# Altium PCB BOTTOM_BOARD.PcbDoc
Units mm, origin at the board's own origin, x right, y up, seen from the top; angles counter-clockwise.
Board outline 102 x 86 mm, 2 copper layers (Top Layer, Bottom Layer), stack 1.071 mm thick; 20 components, 8 nets, 65 pads, 303 vias.
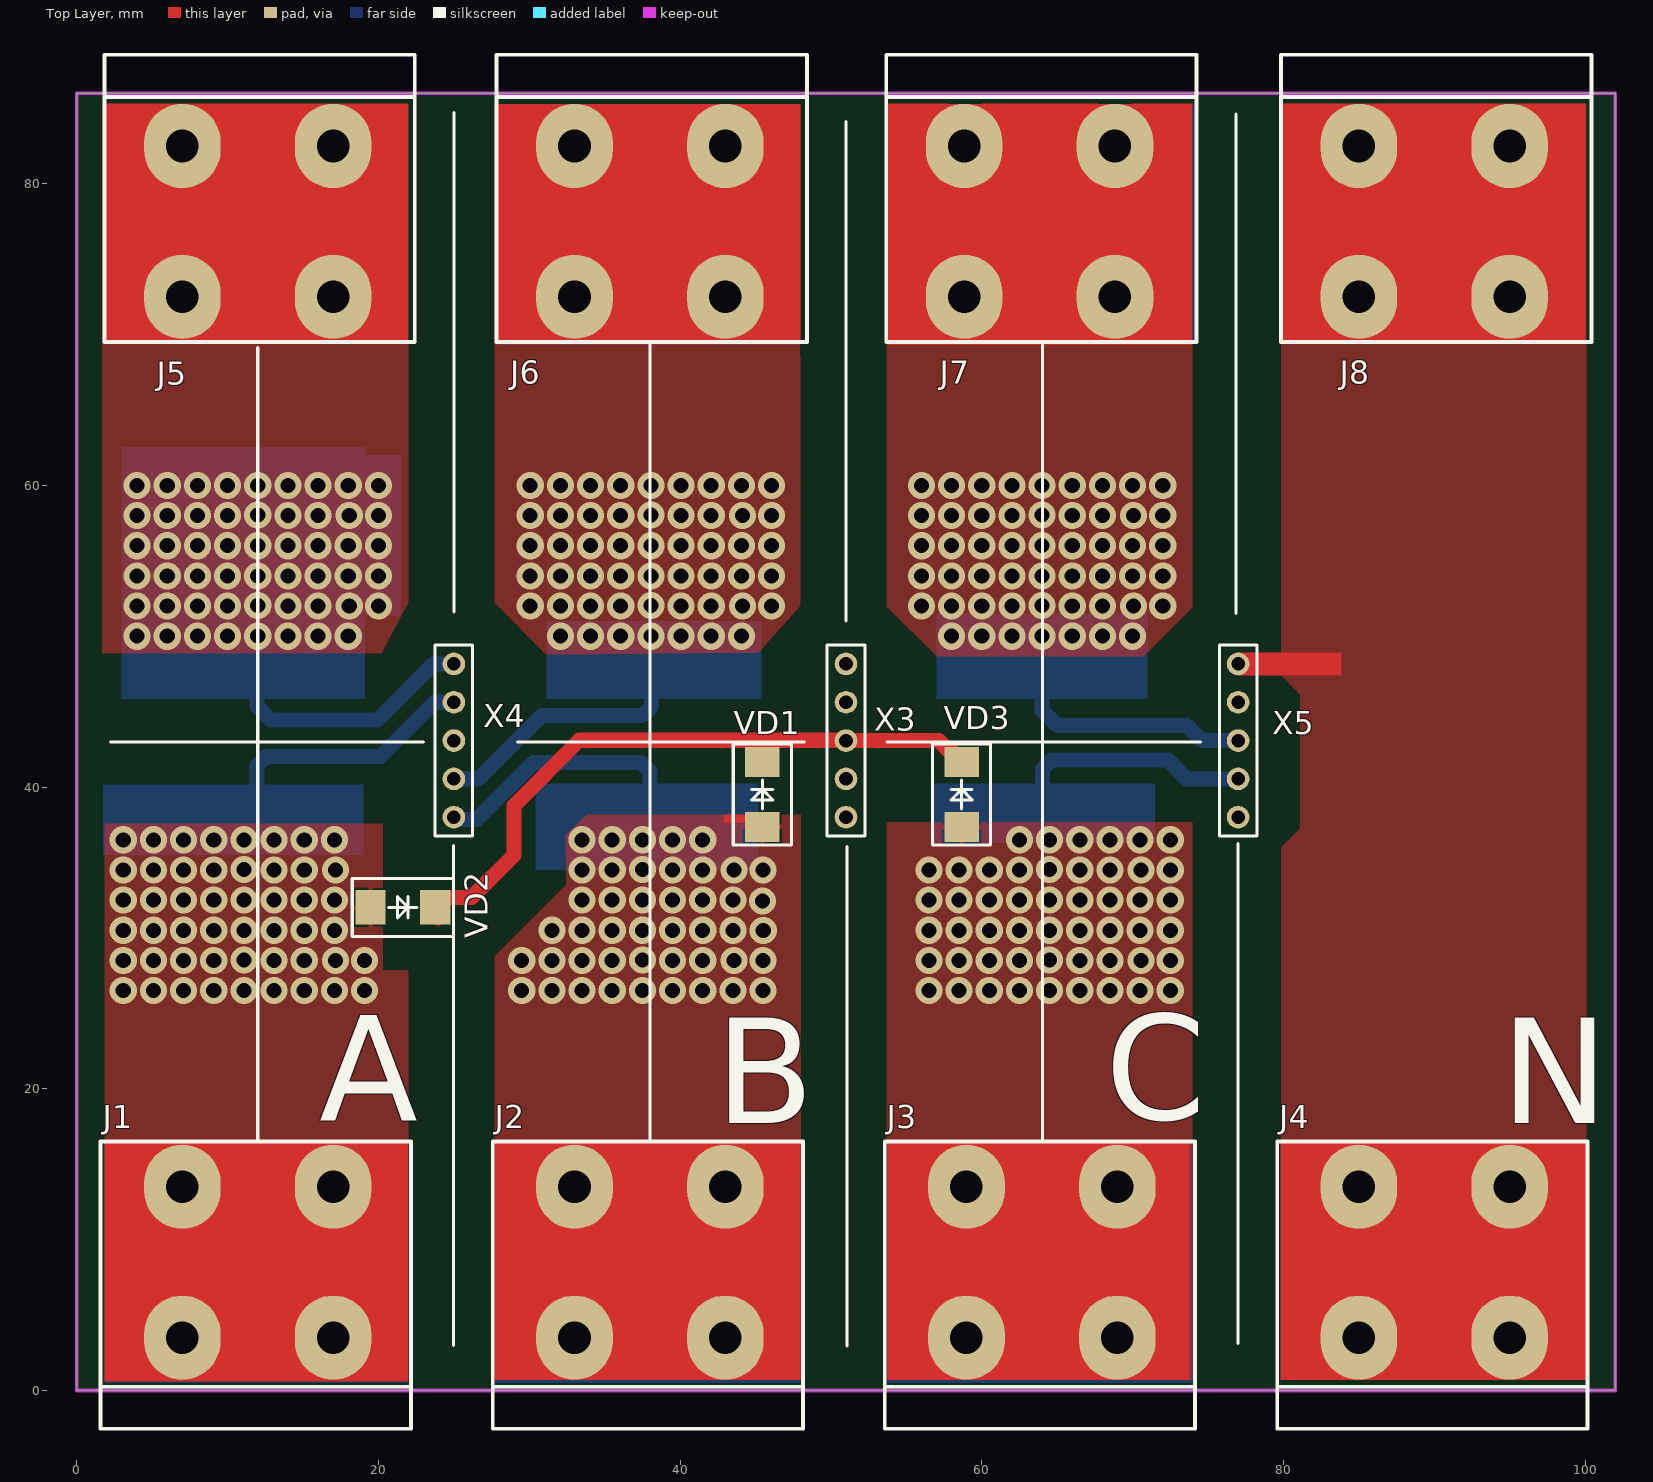
[diagram p0: Top Layer view]
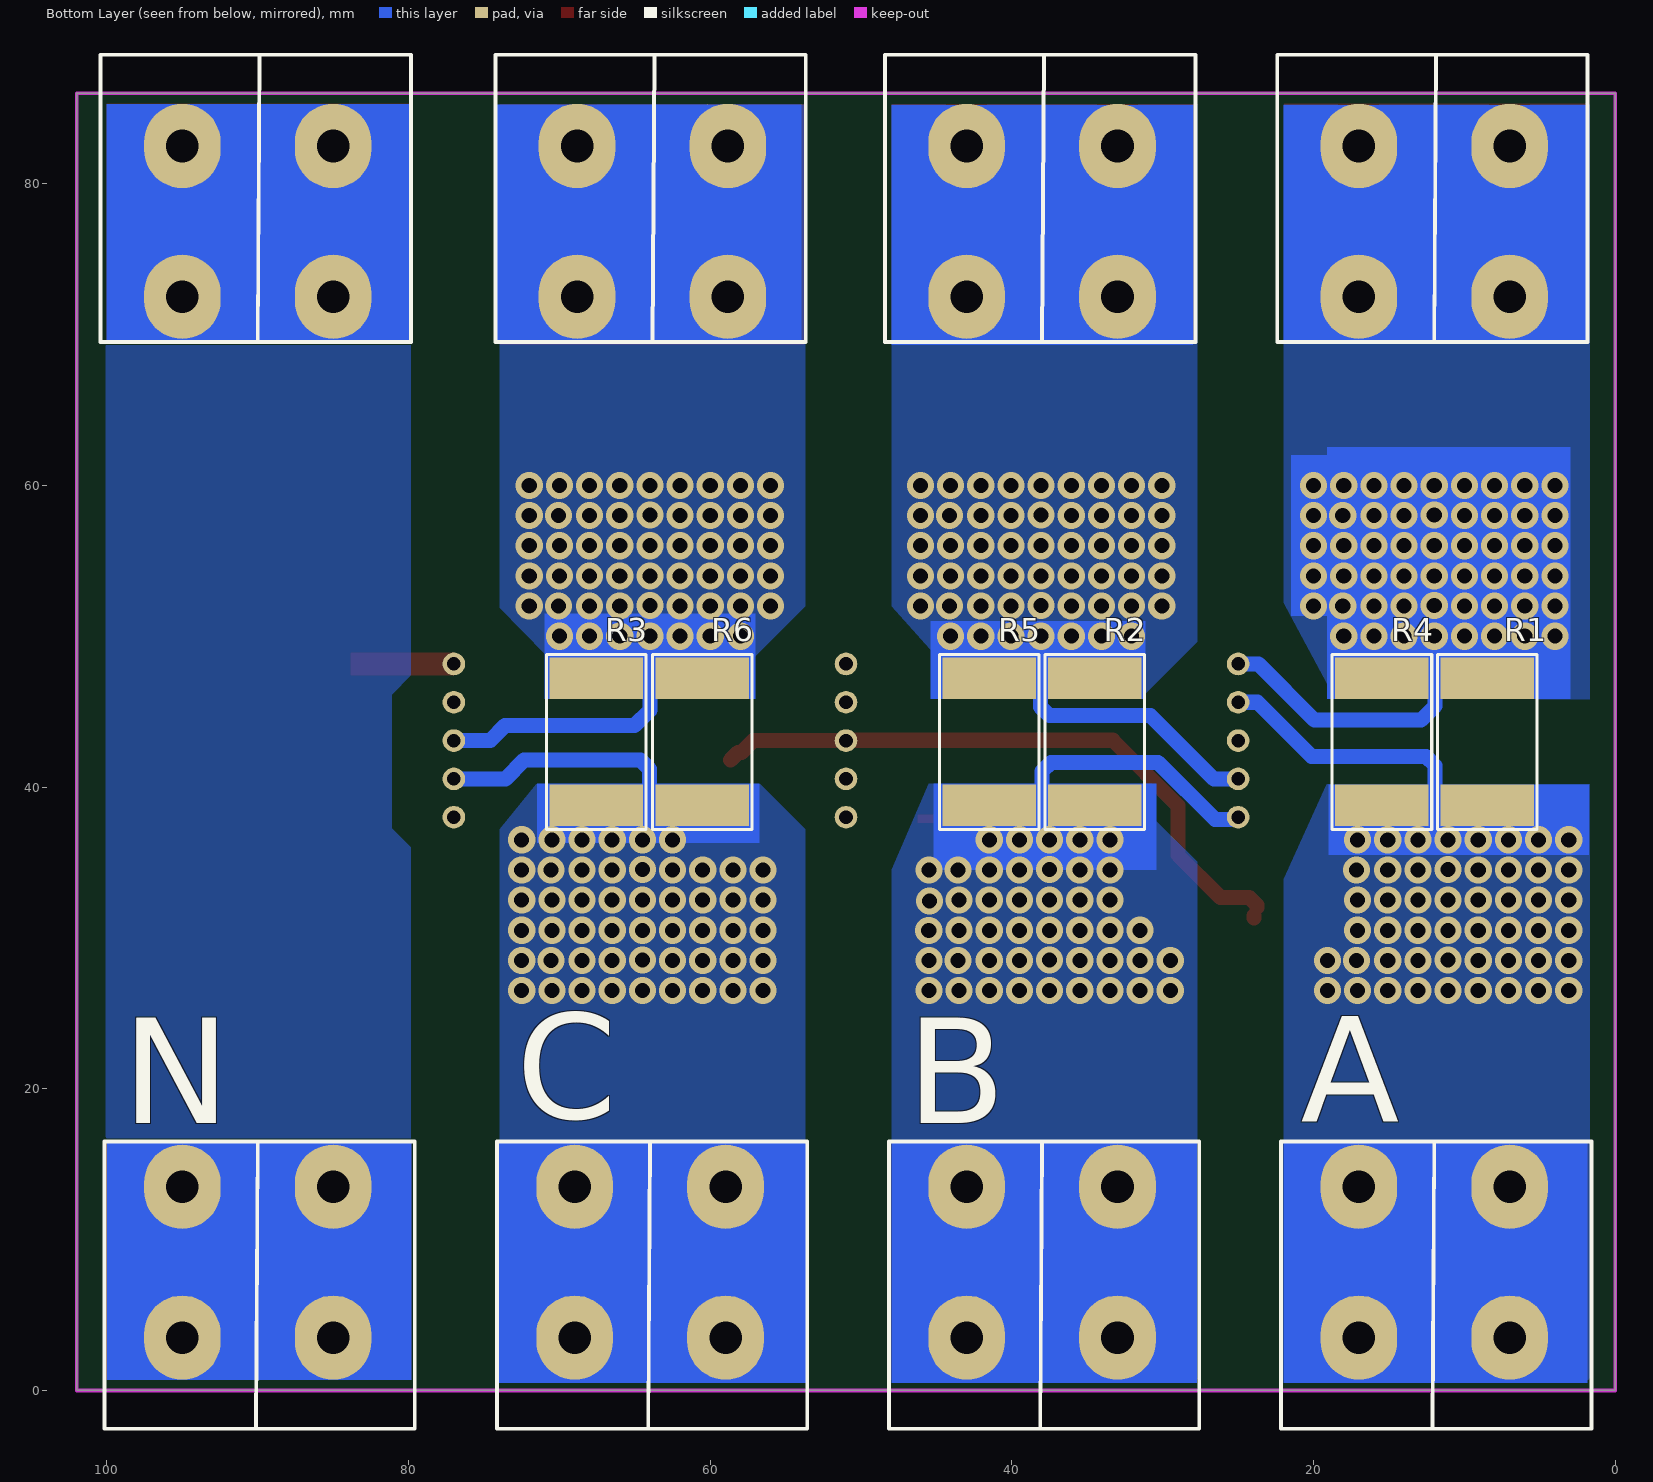
[diagram p1: Bottom Layer view, seen from below]
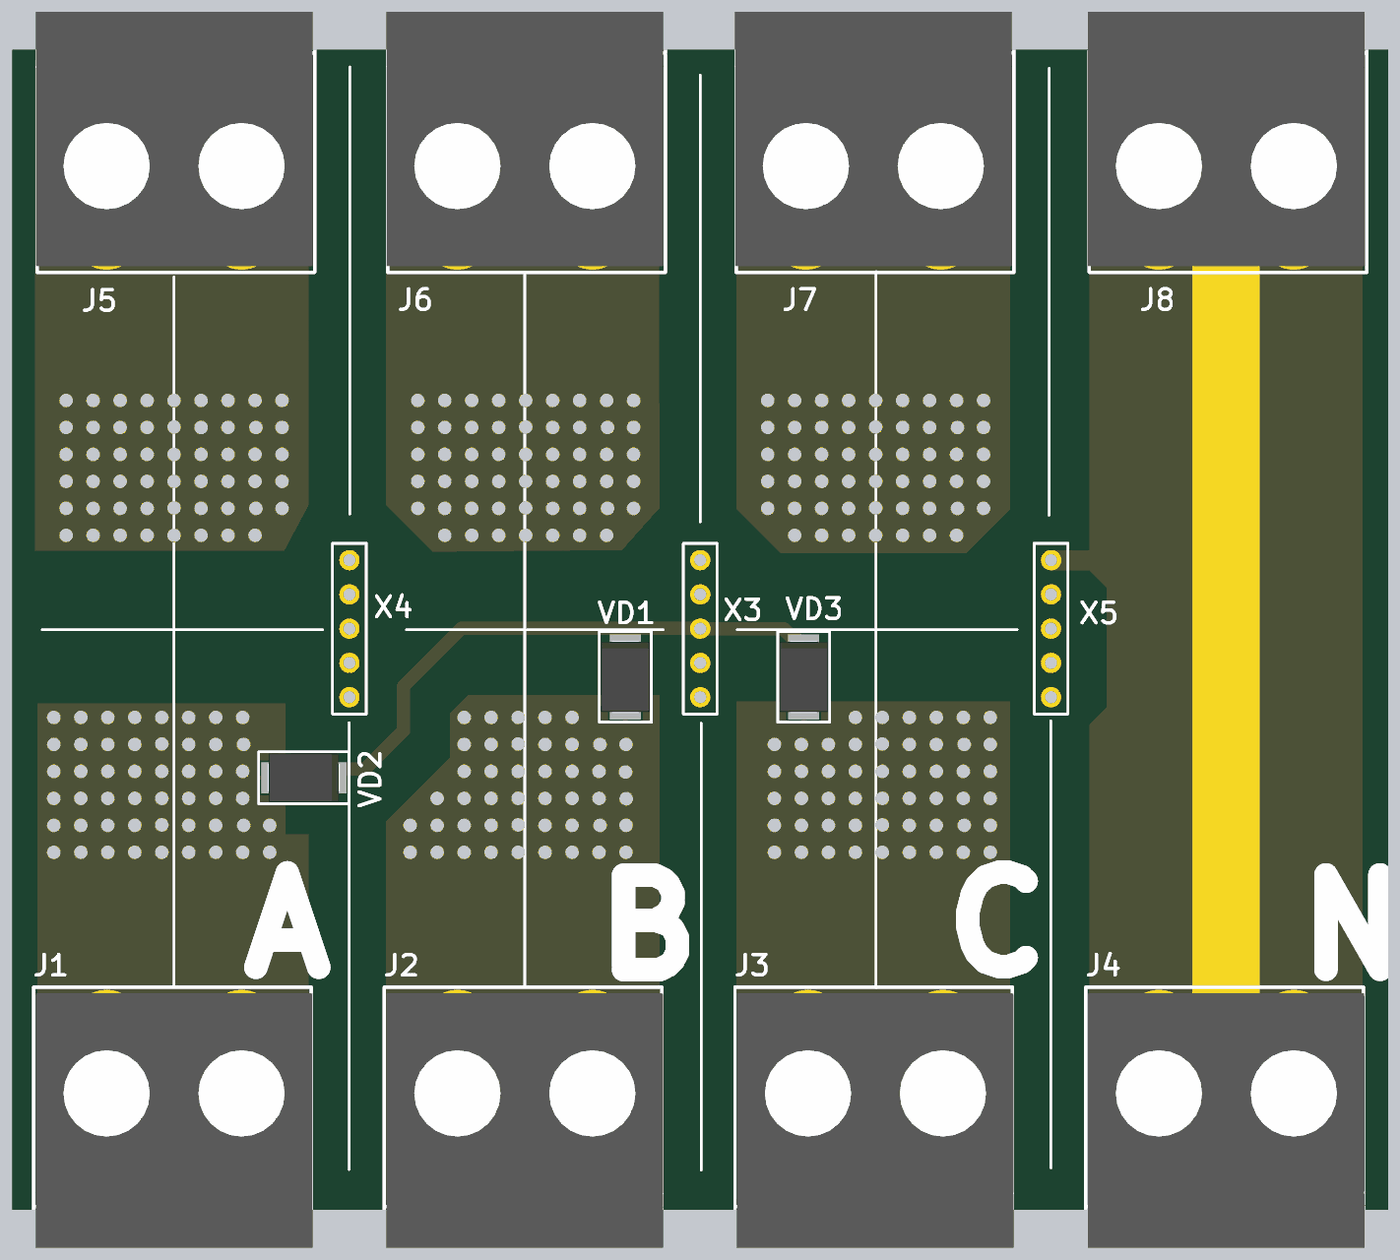
[diagram p2: 3D render of the assembled board from above, using the file's embedded part models]
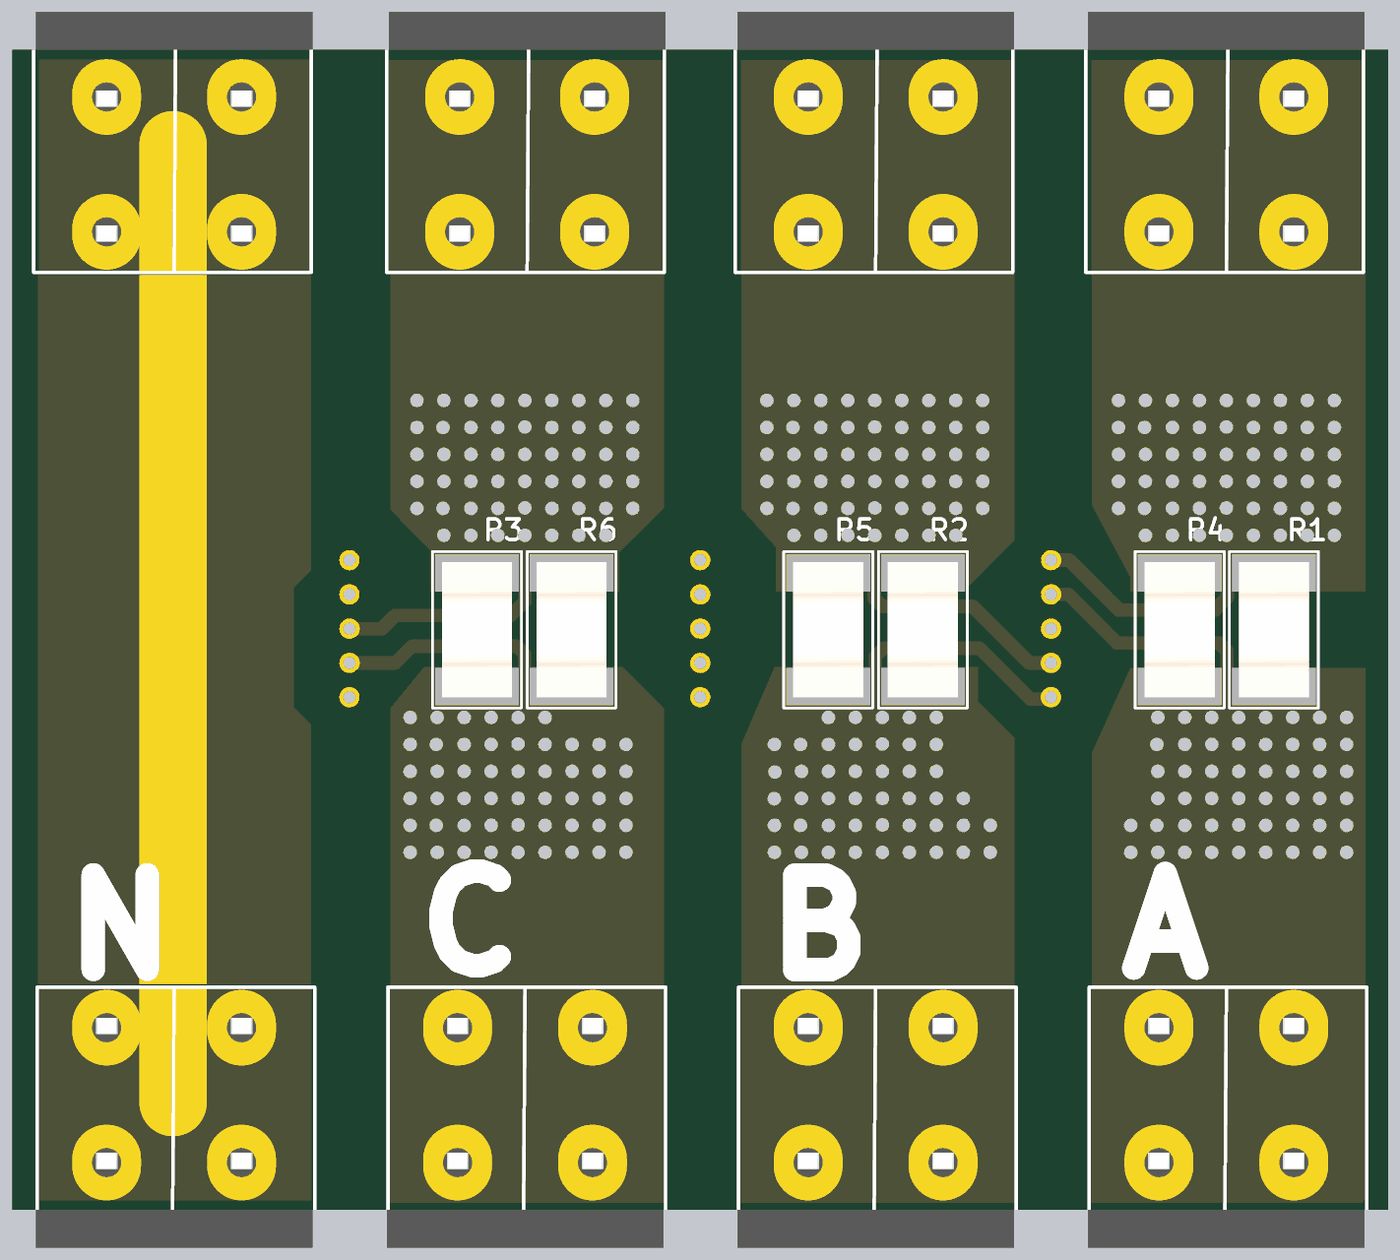
[diagram p3: 3D render of the assembled board from below, using the file's embedded part models]

## Layer stack, top to bottom
Top Solder: solder mask 0.0102, Solder Resist, Dk 3.5
Top Layer: signal copper 0.0356
Dielectric 1: dielectric 1, FR-4, Dk 4.8
Bottom Layer: signal copper 0.0356
Bottom Solder: solder mask 0.0102, Solder Resist, Dk 3.5

## Board outline
0,0 0,86 102,86 102,0

## Design rules (kind name [scope] priority, off if disabled: settings)
Clearance [All] p1: gap=0.2 ignorepadtopadclearanceinfootprint=FALSE
DiffPairsRouting [All] p1: maxlimit=0.254 minlimit=0.254 mostfreqgap=0.254 substack1={A23D90DD-733B-49C5-8102-56B3D284E3A0} toplayer_{a23d90dd-733b-49c5-8102-56b3d284e3a0}_minwidth=0.381 toplayer_{a23d90dd-733b-49c5-8102-56b3d284e3a0}_maxwidth=0.381 toplayer_{a23d90dd-733b-49c5-8102-56b3d284e3a0}_prefwidth=0.381 bottomlayer_{a23d90dd-733b-49c5-8102-56b3d284e3a0}_minwidth=0.381 bottomlayer_{a23d90dd-733b-49c5-8102-56b3d284e3a0}_maxwidth=0.381 bottomlayer_{a23d90dd-733b-49c5-8102-56b3d284e3a0}_prefwidth=0.381 toplayer_minwidth=0.381 toplayer_maxwidth=0.381 toplayer_prefwidth=0.381 bottomlayer_minwidth=0.381 bottomlayer_maxwidth=0.381 bottomlayer_prefwidth=0.381 substack2={0B3DB408-A969-412D-8C07-BA8AE97219D9} toplayer_{0b3db408-a969-412d-8c07-ba8ae97219d9}_minwidth=0.381 toplayer_{0b3db408-a969-412d-8c07-ba8ae97219d9}_maxwidth=0.381 toplayer_{0b3db408-a969-412d-8c07-ba8ae97219d9}_prefwidth=0.381 bottomlayer_{0b3db408-a969-412d-8c07-ba8ae97219d9}_minwidth=0.381 bottomlayer_{0b3db408-a969-412d-8c07-ba8ae97219d9}_maxwidth=0.381 bottomlayer_{0b3db408-a969-412d-8c07-ba8ae97219d9}_prefwidth=0.381 substack3={378827E6-B38F-4565-9D2F-710D8D441C30} toplayer_{378827e6-b38f-4565-9d2f-710d8d441c30}_minwidth=0.381 toplayer_{378827e6-b38f-4565-9d2f-710d8d441c30}_maxwidth=0.381 toplayer_{378827e6-b38f-4565-9d2f-710d8d441c30}_prefwidth=0.381 bottomlayer_{378827e6-b38f-4565-9d2f-710d8d441c30}_minwidth=0.381 bottomlayer_{378827e6-b38f-4565-9d2f-710d8d441c30}_maxwidth=0.381 bottomlayer_{378827e6-b38f-4565-9d2f-710d8d441c30}_prefwidth=0.381 substack4={1E65D4A7-266F-4925-B814-5E9C4A66F8EE} toplayer_{1e65d4a7-266f-4925-b814-5e9c4a66f8ee}_minwidth=0.381 toplayer_{1e65d4a7-266f-4925-b814-5e9c4a66f8ee}_maxwidth=0.381 toplayer_{1e65d4a7-266f-4925-b814-5e9c4a66f8ee}_prefwidth=0.381 bottomlayer_{1e65d4a7-266f-4925-b814-5e9c4a66f8ee}_minwidth=0.381 bottomlayer_{1e65d4a7-266f-4925-b814-5e9c4a66f8ee}_maxwidth=0.381 bottomlayer_{1e65d4a7-266f-4925-b814-5e9c4a66f8ee}_prefwidth=0.381 substack5={93C5D03E-862D-45F8-9871-970EEA9B3F11} toplayer_{93c5d03e-862d-45f8-9871-970eea9b3f11}_minwidth=0.381 toplayer_{93c5d03e-862d-45f8-9871-970eea9b3f11}_maxwidth=0.381 toplayer_{93c5d03e-862d-45f8-9871-970eea9b3f11}_prefwidth=0.381 bottomlayer_{93c5d03e-862d-45f8-9871-970eea9b3f11}_minwidth=0.381 bottomlayer_{93c5d03e-862d-45f8-9871-970eea9b3f11}_maxwidth=0.381 bottomlayer_{93c5d03e-862d-45f8-9871-970eea9b3f11}_prefwidth=0.381 maxuncoupledlength=12.7
Height [All] p1: minheight=0 maxheight=40 prefheight=12.7
HoleSize [All] p1: absolutevalues=TRUE maxlimit=6 minlimit=0.01 maxpercent=80.000 minpercent=20.000
HoleToHoleClearance [All] p1: gap=0.1 allowstackedmicrovias=TRUE
MinimumSolderMaskSliver [All] p1: minsoldermaskwidth=0.1
PlaneConnect [All] p1: pad.planeconnectstyle=Relief pad.reliefexpansion=0.5 pad.reliefentries=4 pad.reliefconductorwidth=0.5 pad.reliefairgap=0.15 via.planeconnectstyle=Direct via.reliefexpansion=0.5 via.reliefentries=4 via.reliefconductorwidth=0.5 via.reliefairgap=0.15
PolygonConnect VQFN20 [HasFootprint('VQFN20')] p1: connectstyle=Direct reliefconductorwidth=0.254 reliefentries=4 polygonreliefangle="90 Angle" airgapwidth=0.254
PolygonConnect [All] p2: thpad.connectstyle=Relief thpad.reliefconductorwidth=0.3 thpad.reliefentries=4 thpad.polygonreliefangle="90 Angle" thpad.airgapwidth=0.15 smdpad.connectstyle=Relief smdpad.reliefconductorwidth=0.3 smdpad.reliefentries=4 smdpad.polygonreliefangle="90 Angle" smdpad.airgapwidth=0.15 via.connectstyle=Direct via.reliefconductorwidth=0.3 via.reliefentries=4 via.polygonreliefangle="90 Angle" via.airgapwidth=0.15
RoutingVias [All] p1: holewidth=0.1 width=0.1 viastyle="Through Hole" minholewidth=0 minwidth=0.3 maxholewidth=2 maxwidth=4
ShortCircuit [All] p1: allowed=TRUE
SilkToSolderMaskClearance [IsPad] p1: minsilkscreentomaskgap=0.1 clearancetoexposedcopper=TRUE
SolderMaskExpansion SolderMaskExpansion_Via [IsVia] p1: expansion=0.102 istentingtop=TRUE
SolderMaskExpansion [All] p2: expansion=0.01 istentingtop=FALSE
UnRoutedNet [All] p1: checkbadconnections=TRUE
Width [All] p1: maxlimit=5 minlimit=0.2 preferedwidth=0.3 substack1={A23D90DD-733B-49C5-8102-56B3D284E3A0} substack2={0B3DB408-A969-412D-8C07-BA8AE97219D9} substack3={378827E6-B38F-4565-9D2F-710D8D441C30} substack4={1E65D4A7-266F-4925-B814-5E9C4A66F8EE} substack5={93C5D03E-862D-45F8-9871-970EEA9B3F11}
21 further rules are at their usual default settings.

## Components (designator, comment, footprint, x,y, rotation, side; value= is the part's Value field where it differs from the comment)
J1 "TL-800" Conn_Tianli_T-800 12,8.5 r0 top locked
J2 "TL-800" Conn_Tianli_T-800 38,8.5 r0 top locked
J3 "TL-800" Conn_Tianli_T-800 63.986,8.5 r0 top
J4 "TL-800" Conn_Tianli_T-800 90,8.5 r0 top locked
J5 "TL-800" Conn_Tianli_T-800 12,77.5 r180 top locked
J6 "TL-800" Conn_Tianli_T-800 38,77.5 r180 top locked
J7 "TL-800" Conn_Tianli_T-800 63.83,77.5 r180 top locked
J8 "TL-800" Conn_Tianli_T-800 90,77.5 r180 top locked
R1 "RES-CONST" RES-3921 8.482,43 r90 bottom
R2 "RES-CONST" RES-3921 34.499,43 r90 bottom
R3 "RES-CONST" RES-3921 67.544,43 r90 bottom
R4 "RES-CONST" RES-3921 15.467,43 r90 bottom
R5 "RES-CONST" RES-3921 41.509,43 r90 bottom
R6 "RES-CONST" RES-3921 60.534,43 r90 bottom
VD1 "DIODE" DO-214BA 45.45,39.5 r270 top locked
VD2 "DIODE" DO-214BA 21.615,32.025 r180 top locked
VD3 "DIODE" DO-214BA 58.667,39.5 r270 top locked
X3 "CONN-5-PIN" CONN-PLS-5-2.54mm 51,38 r90 top locked
X4 "CONN-5-PIN" CONN-PLS-5-2.54mm 25,38 r90 top locked
X5 "CONN-5-PIN" CONN-PLS-5-2.54mm 77,38 r90 top locked

## Footprints (in the part's own frame and the unit in brackets; to place one, negate y for a bottom-side part, rotate by r counter-clockwise, add the part's x,y. Pads: shape width x height; smd on the part's side, far side on the other; paste and mask are expansions set on the pad)
CONN-PLS-5-2.54mm [mm]
  round 1.5 hole 0.9: 1(0,0) 2(2.54,0) 3(5.08,0) 4(7.62,0) 5(10.16,0)
  silkscreen extent -1.25,-1.25 11.41,1.25
Conn_Tianli_T-800 [mm]
  oval 5.08x5.588 hole 2.159: 1(-5,-5) 1(-5,5) 2(5,-5) 2(5,5)
  silkscreen extent -10.41,-11.05 10.16,8, body extent -10.25,-11.3 10.25,7.55, height 30.75
DO-214BA [mm]
  rect 2x2.3 smd: 1(-2.15,0) 2(2.15,0)
  silkscreen extent -3.35,-1.92 3.35,1.92, body extent -2.7,-1.81 2.7,1.81, height 3.3
RES-3921 [mm]
  rect 2.75x6.2 smd: 1(-4.2,0) 2(4.2,0)
  silkscreen extent -5.8,-3.3 5.8,3.3, body extent -5,-2.6 5,2.6, height 0.83

## Part data
J1 J2 J3 J4 J5 J6 J7 J8: library part Connector_Tianli_T-800

## Via types
v1: diameter 1.8, hole 1, Top Layer to Bottom Layer, tented both sides, 303 vias

## Nets (pads, with @x,y where several pads share a name; then routed paths per layer and width w, separated by ;. In a path a pad name is that pad's centre, name@x,y a point inside that pad or via, vN(x,y) a via of type N, cw(c..) or ccw(c..) an arc to the next point about the centre after c; other vN are vias at no path point)
A_IN: J1.1 J1.2 R1.1 R4.1 VD2.2 X4.4 | length 17.4
  Bottom Layer w1: 11.963,38.76 11.963,41.439 12.549,42.025 20.125,42.025 23.72,45.62 X4.4
  other v1: 3.086,26.5 5.086,26.5 7.086,26.5 9.086,26.5 11.086,26.5 13.086,26.5 15.086,26.5 17.086,26.5 19.086,26.5 3.086,28.5 5.086,28.5 7.086,28.5 9.086,28.5 13.086,28.5 15.086,28.5 17.153,28.5 19.086,28.5 11.086,28.532 3.086,30.5 5.086,30.5 7.086,30.5 9.086,30.5 11.086,30.5 13.086,30.5 15.086,30.5 17.086,30.5 3.086,32.5 5.086,32.5 7.086,32.5 9.086,32.5 11.086,32.5 13.086,32.5 15.086,32.5 17.086,32.5 3.086,34.5 5.086,34.5 7.086,34.5 9.086,34.5 13.086,34.5 15.086,34.5 17.153,34.5 11.086,34.532 3.086,36.5 5.086,36.5 7.086,36.5 9.086,36.5 11.086,36.5 13.086,36.5 15.086,36.5 17.086,36.5
A_OUT: J5.1 J5.2 R1.2 R4.2 X4.5 | length 16.9
  Bottom Layer w1: 12,47.315 11.938,47.253 11.938,45.379 12.867,44.45 19.95,44.45 23.66,48.16 X4.5
  other v1: 4,50 6,50 8,50 10,50 12,50 14,50 16,50 18,50 4,52 6,52 8,52 10,52 14,52 16,52 18.067,52 20,52 12,52.032 4,54 6,54 8,54 10,54 12,54 14,54 16,54 18,54 20,54 4,56 6,56 8,56 10,56 12,56 14,56 16,56 18,56 20,56 4,58 6,58 8,58 10,58 14,58 16,58 18.067,58 20,58 12,58.032 4,60 6,60 8,60 10,60 12,60 14,60 16,60 18,60 20,60
B_IN: J2.1 J2.2 R2.1 R5.1 VD1.2 X4.1 | length 17.1
  Bottom Layer w1: X4.1 25.096,37.904 25.449,37.904 25.504,37.85 26.525,37.85 30.306,41.631 37.414,41.631 38,41.045 38,38.8
  other v1: 29.5,26.5 31.5,26.5 33.5,26.5 35.5,26.5 37.5,26.5 39.5,26.5 41.5,26.5 43.5,26.5 45.5,26.5 29.5,28.5 31.5,28.5 33.5,28.5 35.5,28.5 39.5,28.5 41.5,28.5 43.567,28.5 45.5,28.5 37.5,28.532 45.513,30.48 31.5,30.5 33.5,30.5 35.5,30.5 37.5,30.5 39.5,30.5 41.5,30.5 43.5,30.5 45.462,32.455 33.5,32.5 35.5,32.5 37.5,32.5 39.5,32.5 41.5,32.5 43.5,32.5 33.5,34.5 35.5,34.5 39.5,34.5 41.5,34.5 43.567,34.5 45.5,34.5 37.5,34.532 33.5,36.5 35.5,36.5 37.5,36.5 39.5,36.5 41.5,36.5
B_OUT: J6.1 J6.2 R2.2 R5.2 X4.2 | length 17
  Bottom Layer w1: X4.2 26.615,40.54 30.804,44.729 37.514,44.729 38.1,45.315 38.1,47.2
  other v1: 32.062,50 34.062,50 36.062,50 38.062,50 40.062,50 42.062,50 44.062,50 30.062,52 32.062,52 34.062,52 36.062,52 40.062,52 42.062,52 44.128,52 46.062,52 38.062,52.032 30.062,54 32.062,54 34.062,54 36.062,54 38.062,54 40.062,54 42.062,54 44.062,54 46.062,54 30.062,56 32.062,56 34.062,56 36.062,56 38.062,56 40.062,56 42.062,56 44.062,56 46.062,56 30.062,58 32.062,58 34.062,58 36.062,58 40.062,58 42.062,58 44.128,58 46.062,58 38.062,58.032 30.062,60 32.062,60 34.062,60 36.062,60 38.062,60 40.062,60 42.062,60 44.062,60 46.062,60
C_IN: J3.1 J3.2 R3.1 R6.1 VD3.2 X5.2 | length 16.1
  Bottom Layer w1: 64.033,38.788 64.033,41.197 64.619,41.783 72.339,41.783 73.582,40.54 X5.2
  other v1: 56.5,26.5 58.5,26.5 60.5,26.5 62.5,26.5 64.5,26.5 66.5,26.5 68.5,26.5 70.5,26.5 72.5,26.5 56.5,28.5 58.5,28.5 60.5,28.5 62.5,28.5 66.5,28.5 68.5,28.5 70.567,28.5 72.5,28.5 64.5,28.532 56.5,30.5 58.5,30.5 60.5,30.5 62.5,30.5 64.5,30.5 66.5,30.5 68.5,30.5 70.5,30.5 72.5,30.5 56.5,32.5 58.5,32.5 60.5,32.5 62.5,32.5 64.5,32.5 66.5,32.5 68.5,32.5 70.5,32.5 72.5,32.5 56.5,34.5 58.5,34.5 60.5,34.5 62.5,34.5 66.5,34.5 68.5,34.5 70.567,34.5 72.5,34.5 64.5,34.532 62.5,36.5 64.5,36.5 66.5,36.5 68.5,36.5 70.5,36.5 72.5,36.5
C_OUT: J7.1 J7.2 R3.2 R6.2 X5.3 | length 15.9
  Bottom Layer w1: 64,47.2 64,45.093 65.024,44.069 73.599,44.069 74.588,43.08 X5.3
  other v1: 58,50 60,50 62,50 64,50 66,50 68,50 70,50 56,52 58,52 60,52 62,52 66,52 68,52 70.067,52 72,52 64,52.032 56,54 58,54 60,54 62,54 64,54 66,54 68,54 70,54 72,54 56,56 58,56 60,56 62,56 64,56 66,56 68,56 70,56 72,56 56,58 58,58 60,58 62,58 66,58 68,58 70.067,58 72,58 64,58.032 56,60 58,60 60,60 62,60 64,60 66,60 68,60 70,60 72,60
DC_HV: VD1.1 VD2.1 VD3.1 X3.3 | length 42.2
  Top Layer w1: VD2.1 23.765,32.175 24.265,32.675 26.175,32.675 29,35.5 29,38.785 33.315,43.1 44.55,43.1 X3.3@50.98,43.1 ; VD2.1@23.943,31.318 VD2.1@23.943,31.468 ; X3.3 57.153,43.08 57.934,42.299 58.167,42.299 VD3.1@58.667,41.799
NEUTRAL: J4.1 J4.2 J8.1 J8.2 X5.5
pads on no net: X3.1 X3.2 X3.4 X3.5 X4.3 X5.1 X5.4
copper on no net: | length 0.1
  Top Layer w1: 51,48.16 51.096,48.064

## Polygon pours and split planes (outlines as drawn)
A_OUT on Bottom Layer "NONET_L-01_P-001" (solid, pour order 9): 1.7,45.82 1.7,85.228 21.969,85.228 21.969,63.714 21.969,52.234 18.567,45.82
B_OUT on Bottom Layer "NONET_L-01_P-001" (solid, pour order 11): 27.7,49.643 27.7,85.228 47.969,85.228 47.969,63.714 47.969,51.979 42.428,45.836 31.453,45.89
no net on Bottom Layer "NONET_L-01_P-001" (solid, pour order 14): 79.842,0.718 79.842,35.999 81.126,37.283 81.126,46.125 79.842,47.408 79.842,85.293 100.08,85.293 100.08,21.056 100.08,0.718
B_IN on Bottom Layer "NONET_L-01_P-001" (solid, pour order 10): 27.7,0.7 27.72,35.04 30.725,38.045 30.725,40.234 45.5,40.234 47.969,34.5 47.969,0.72
C_OUT on Bottom Layer "NONET_L-01_P-001" (solid, pour order 13): 53.7,51.989 53.7,85.228 73.969,85.228 73.969,63.714 73.969,51.897 70.844,48.72 57.023,48.666
C_IN on Bottom Layer "NONET_L-01_P-001" (solid, pour order 12): 53.7,0.7 53.7,37.199 56.675,40.174 71.526,40.174 73.969,37.199 73.969,20.675 73.969,0.72
A_IN on Bottom Layer "NONET_L-01_P-001" (solid, pour order 8): 1.7,0.7 1.7,40.175 19.125,40.175 21.969,33.9 21.969,20.675 21.969,0.72
B_IN on Top Layer "NONET_L-01_P-001" (solid, pour order 2): 27.72,0.72 27.72,28.787 32.44,33.507 32.435,36.835 33.775,38.175 48.005,38.175 48.005,27.922 47.969,0.72
NEUTRAL on Top Layer "NONET_L-01_P-001" (solid, pour order 7): 79.842,0.718 79.842,35.999 81.125,37.282 81.125,46.127 79.842,47.41 79.842,85.293 100.08,85.293 100.08,21.056 100.08,0.718
C_OUT on Top Layer "NONET_L-01_P-001" (solid, pour order 5): 57,48.666 53.7,51.966 53.7,85.325 73.969,85.325 73.969,63.811 73.969,51.897 70.739,48.666
B_OUT on Top Layer "NONET_L-01_P-001" (solid, pour order 3): 31.139,48.786 27.7,52.225 27.7,85.228 47.938,85.228 47.982,52.023 45.199,48.908
C_IN on Top Layer "NONET_L-01_P-001" (solid, pour order 4): 53.7,0.7 53.7,27.884 53.7,37.675 73.969,37.675 73.969,20.675 73.969,0.72
A_OUT on Top Layer "NONET_L-01_P-001" (solid, pour order 1): 1.7,48.87 1.7,85.228 21.969,85.228 21.969,63.714 21.969,52.234 20.178,48.87
A_IN on Top Layer "NONET_L-01_P-001" (solid, pour order 0): 1.854,0.701 1.854,37.55 20.275,37.55 20.275,27.837 21.978,27.837 21.978,0.701

## Keep-outs
Keep-Out Layer:
  the board outline again, w0.254

## Other copper
Top Layer:
  rectangle net B_IN: 42.925,37.611 46.25,38.175
  rectangle net A_IN: 1.854,0.584 21.978,16.561
  rectangle net B_IN: 27.727,0.686 47.969,16.501
  rectangle net C_IN: 53.736,0.686 73.787,16.459
  rectangle net NEUTRAL: 79.811,0.698 100.08,16.501
  rectangle net NEUTRAL: 79.84,69.499 100.039,85.325
  rectangle net C_OUT: 53.79,69.317 73.939,85.294
  rectangle net B_OUT: 27.79,69.51 47.969,85.294
  rectangle net A_OUT: 1.923,69.524 21.969,85.319
  rectangle net NEUTRAL: 77,47.41 83.845,48.91
Bottom Layer:
  rectangle net C_OUT: 57,45.825 71,51.5
  rectangle net C_IN: 56.742,36.299 71.5,40.234
  rectangle net B_OUT: 31.148,45.82 45.404,51
  rectangle net B_IN: 30.4,34.5 45.199,40.234
  rectangle net A_IN: 1.75,35.5 19,40.175
  rectangle net A_OUT: 14.596,51.325 21.5,62
  rectangle net A_OUT: 2.958,45.82 19.125,62.548
  rectangle net NEUTRAL: 79.84,69.5 100.039,85.269
  rectangle net C_OUT: 53.944,69.525 74.244,85.253
  rectangle net B_OUT: 28,69.317 48,85.228
  rectangle net A_OUT: 1.923,69.559 22,85.228
  rectangle net NEUTRAL: 79.821,0.698 100,16.501
  rectangle net C_IN: 53.607,0.5 74,16.501
  rectangle net B_IN: 27.727,0.5 48,16.501
  rectangle net A_IN: 1.854,0.5 22,16.441

## Silkscreen, mask and mechanical layers (free items; w line width, h text height)
Top Overlay:
  lines w0.2: 2.235,43 23,43 ; 12,16.501 12,69.139 ; 24.977,2.992 24.977,36.117 ; 25.027,51.592 25.027,84.717 ; 29.235,43 48.239,43 ; 38,16.483 38,69.499 ; 51,51 51,84.125 ; 51.066,2.943 51.066,36.068 ; 53.735,43 74.5,43 ; 64.033,16.459 64.033,69.545 ; 76.861,51.492 76.861,84.617 ; 76.986,3.117 76.986,36.242
  text "C" at 68.175,17.925 h7
  text "A" at 16.075,17.875 h7
  text "N" at 94.4,17.725 h7
  text "B" at 42.335,17.7 h7
Bottom Overlay:
  text "C" at 72.875,18 h7
  text "A" at 20.85,17.825 h7
  text "N" at 98.975,17.725 h7
  text "B" at 46.975,17.7 h7
Top Solder:
  lines w5: 89.967,8 89.967,79
Bottom Solder:
  lines w5: 90.075,7.95 90.075,78.95